# Altium PCB ETAPA DE POTENCIA CERROJO.PcbDoc
Units mm, origin at the board's own origin, x right, y up, seen from the top; angles counter-clockwise.
Board outline 42 x 40 mm, 2 copper layers (Top Layer, Bottom Layer); 8 components, 6 nets, 25 pads, 0 vias.
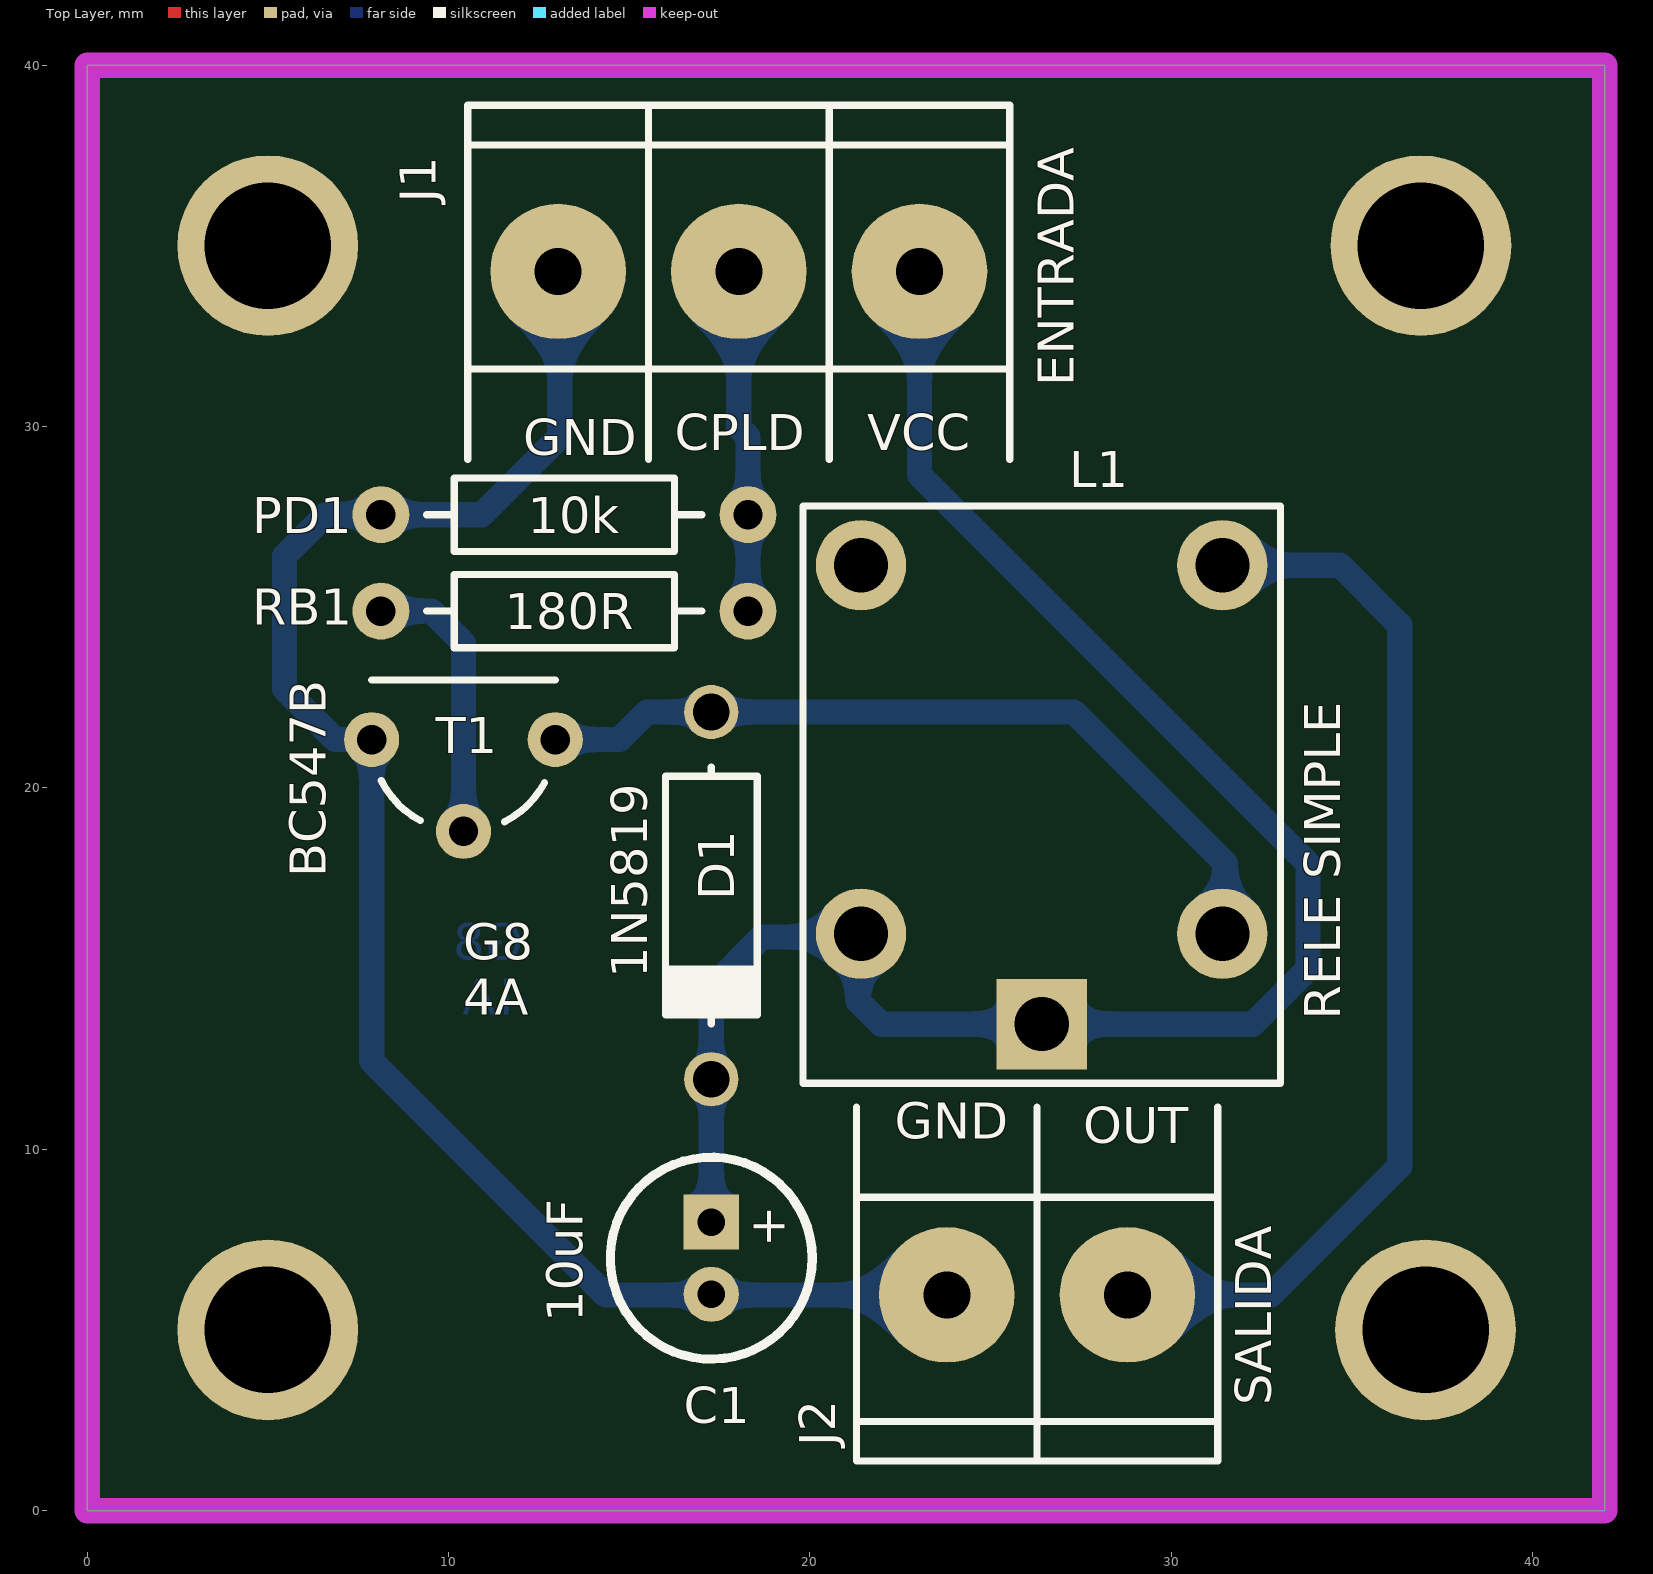
[diagram p0: Top Layer view]
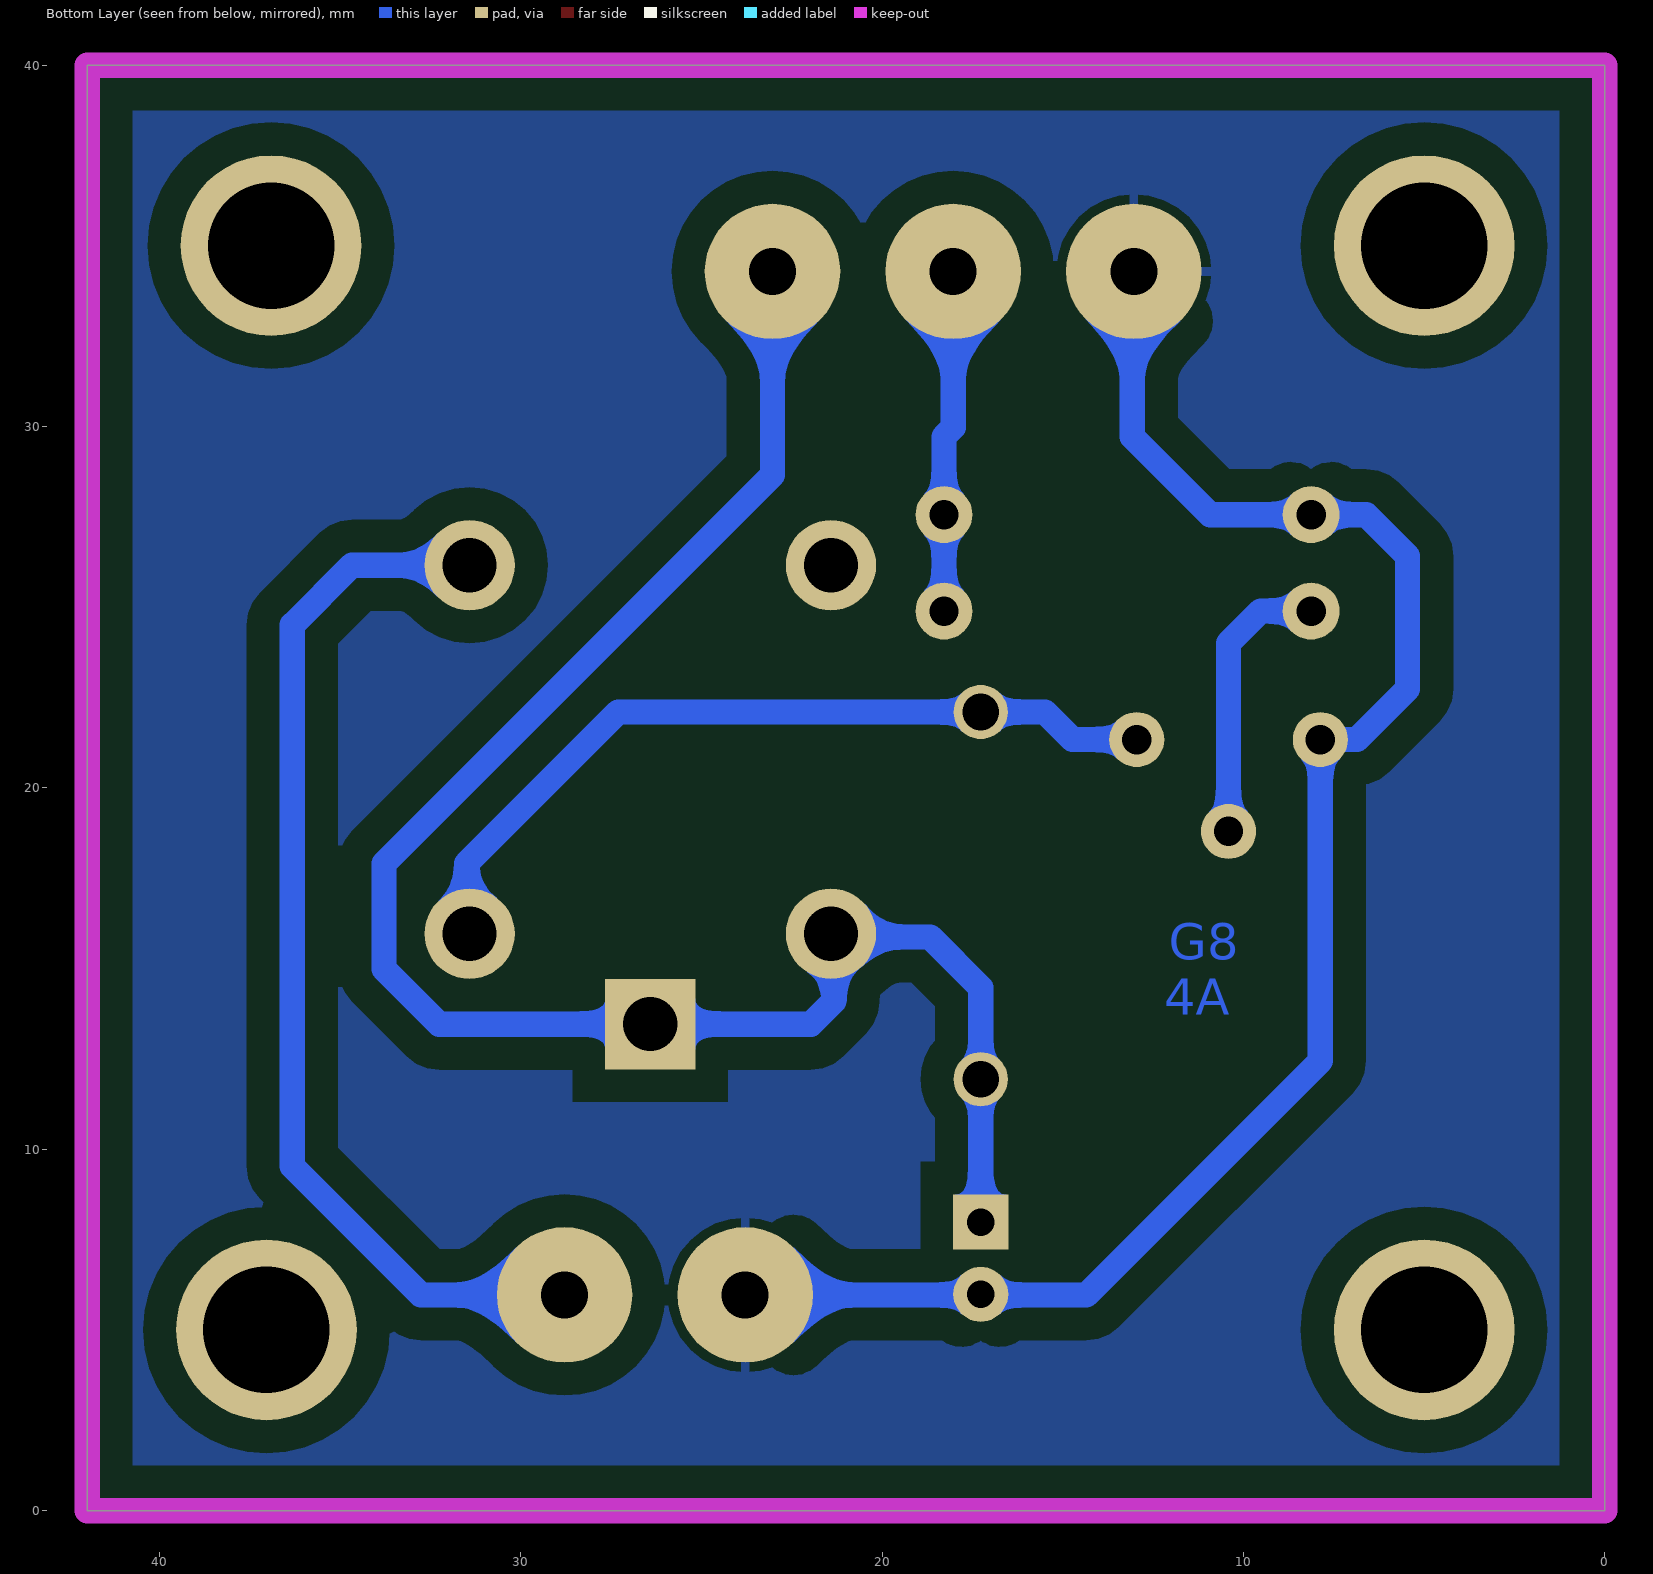
[diagram p1: Bottom Layer view, seen from below]
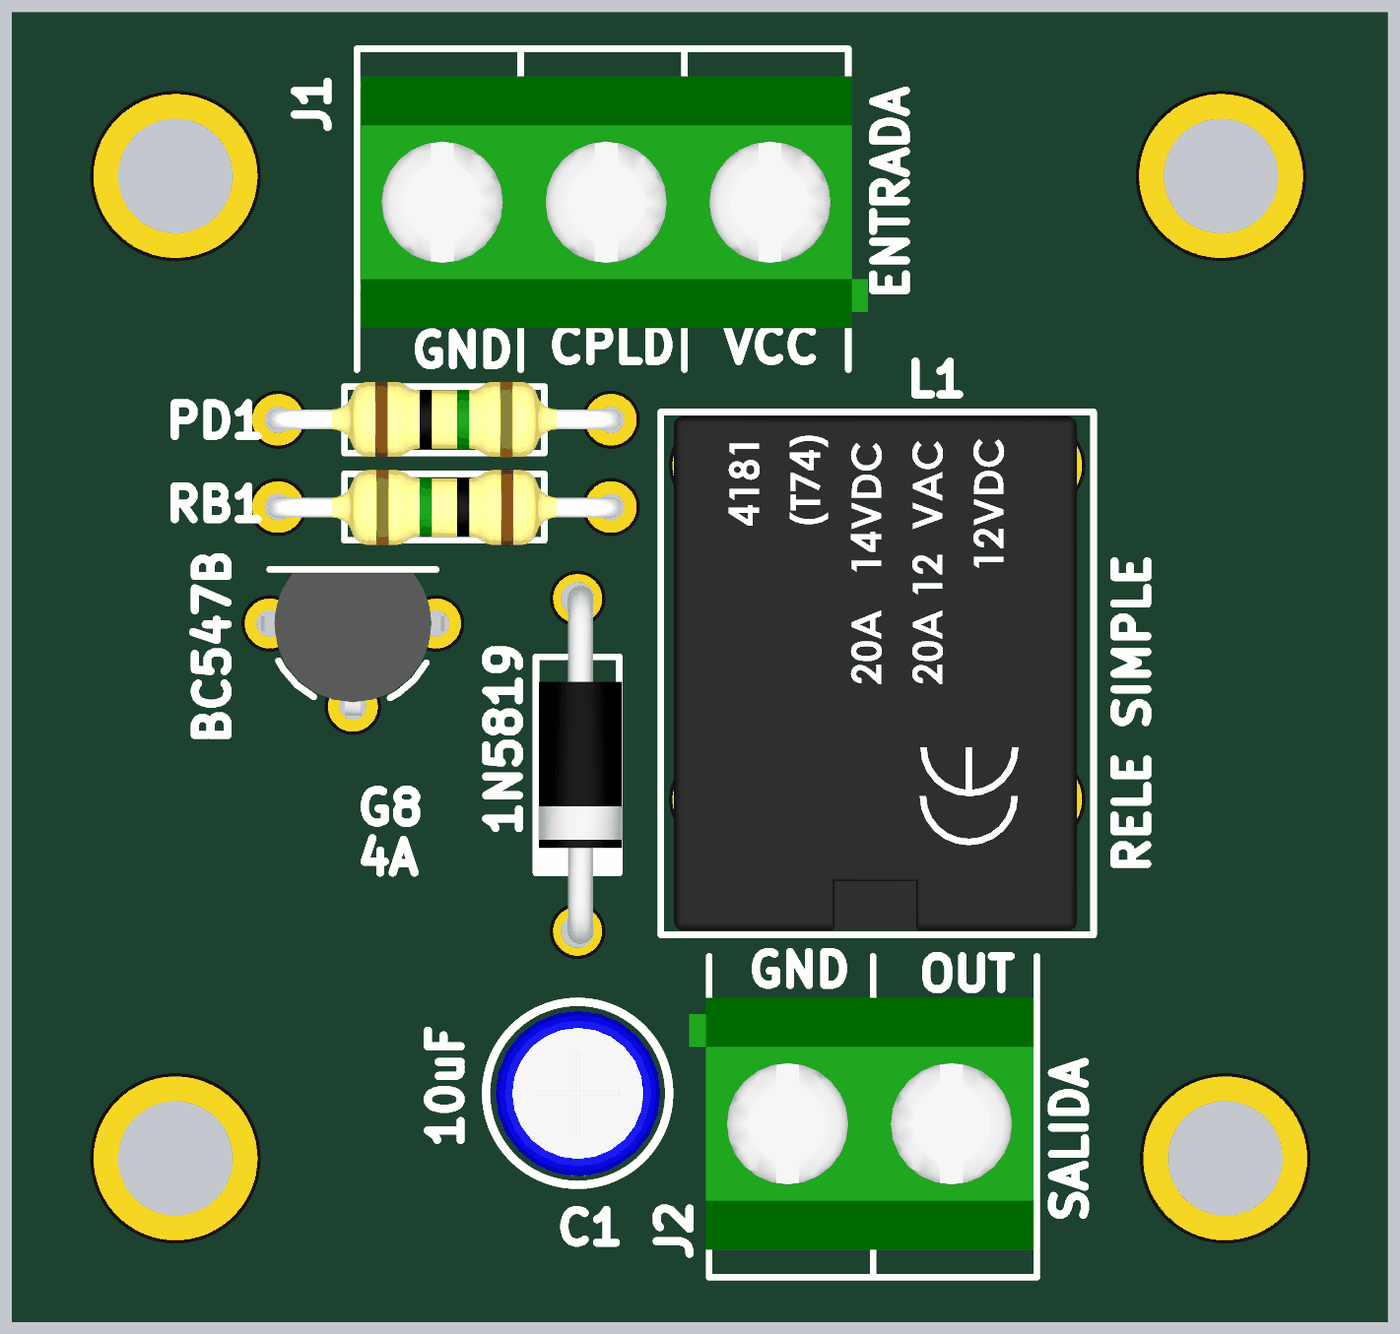
[diagram p2: 3D render of the assembled board from above, using the file's embedded part models]

## Layer stack, top to bottom
Top Solder: solder mask 0.0102, Solder Resist, Dk 3.5
Top Layer: signal copper 0.0356
Dielectric1: dielectric 0.32, FR-4, Dk 4.8
Bottom Layer: signal copper 0.0356
Bottom Solder: solder mask 0.0102, Solder Resist, Dk 3.5

## Board outline
0,0 0,40 42,40 42,0

## Design rules (kind name [scope] priority, off if disabled: settings)
Clearance POLYGON [InPolygon] p1: gap=0.9
Clearance [All] p2: gap=0.3
PolygonConnect [All] p1: connectstyle=Relief reliefconductorwidth=0.254 reliefentries=4 polygonreliefangle="90 Angle" airgapwidth=0.254
RoutingVias [All] p1: holewidth=0.711 width=1.27 viastyle="Through Hole" minholewidth=0.711 minwidth=1.27 maxholewidth=0.711 maxwidth=1.27
SilkToSolderMaskClearance SilkscreenOverComponentPads [IsPad] p1: minsilkscreentomaskgap=0.254 clearancetoexposedcopper=TRUE
SolderMaskExpansion [All] p1: expansion=0.102
Width [All] p1: maxlimit=2 minlimit=0.254 preferedwidth=0.7 toplayer_maxwidth=0.254 toplayer_prefwidth=0.254 bottomlayer_minwidth=0.7 minimp=50.000000 maximp=50.000000 favimp=50.000000
29 further rules are at their usual default settings.

## Components (designator, comment, footprint, x,y, rotation, side; value= is the part's Value field where it differs from the comment)
C1 "10uF" CAP100RP 17.272,6.985 r270 top
D1 "1N5819" DO41 17.272,17.018 r270 top
J1 "ENTRADA" BORNERA3 18.034,34.29 r270 top
J2 "SALIDA" BORNERA2 26.289,5.969 r90 top
L1 "RELE SIMPLE" "RELE SERIE 964" 26.416,19.812 r90 top
PD1 "10k" RES400 8.128,27.559 r0 top
RB1 "180R" RES400 18.288,24.892 r180 top
T1 "BC547B" TO92 10.414,20.066 r0 top

## Footprints (in the part's own frame and the unit in brackets; to place one, negate y for a bottom-side part, rotate by r counter-clockwise, add the part's x,y. Pads: shape width x height; smd on the part's side, far side on the other; paste and mask are expansions set on the pad)
BORNERA2 [mm] "Bornera con Tornillos 5mm separación"
  round 3.75 hole 1.3: 1(0,2.5) 2(0,-2.5)
  silkscreen extent -4.6,-5 5.2,5, body extent -3.76,-4.89 3.94,5.61, height 10
BORNERA3 [mm] "Bornera con Tornillos 5mm separación"
  round 3.75 hole 1.3: 1(0,5) 2(0,0) 3(0,-5)
  silkscreen extent -4.6,-7.5 5.2,7.5, body extent -3.76,-7.39 3.94,8.11, height 10.05
CAP100RP [mil] "Body diameter 5mm"
  rect 60x60 hole 30: 1(-39.37,0)
  round 60 hole 30: 2(39.37,0)
  silkscreen extent -110,-110 110,110, body extent -99,-99 99,100, height 454
DO41 [mm]
  round 1.5 hole 1.016: 1(-5.08,0) 2(5.08,0)
  silkscreen extent -3.56,-1.27 3.56,1.27, body extent -5.46,-1.19 5.46,1.37, height 2.03
"RELE SERIE 964" [mm]
  round 2.5 hole 1.5: B1(-3.85,-5) B2(-3.85,5) NA1(6.35,-5) NC1(6.35,5)
  rect 2.5x2.5 hole 1.5: C1(-6.35,0)
  silkscreen extent -7.99,-6.6 7.99,6.6, body extent -7.85,-6.1 7.85,6.2, height 13.66
RES400 [mil]
  round 62 hole 32: 1(0,0) 2(400,0)
  silkscreen extent 50,-40 350,40, body extent -12,-45 412,46, height 96
TO92 [mil]
  round 60 hole 32: 1(0,-50) 2(100,50) 3(-100,50)
  silkscreen extent -100,-39 100,115, body extent -110,-61 110,110, height 315

## Part data
C1: library part CAPPOL
D1: library part DIODO
J1: library part "BORNERA 3"
J2: library part "BORNERA 2"
PD1 RB1: library part RES
T1: library part "TRANSISTOR NPN"

## Free pads (board coordinates)
  round 5 hole 3.5: 0(5,5) 0(5,35.005) 0(36.91,35.005) 0(37.037,5)

## Nets (pads, with @x,y where several pads share a name; then routed paths per layer and width w, separated by ;. In a path a pad name is that pad's centre, name@x,y a point inside that pad or via, vN(x,y) a via of type N, cw(c..) or ccw(c..) an arc to the next point about the centre after c; other vN are vias at no path point)
CERROJO: J1.2 PD1.2 RB1.1 | length 8.5
  Bottom Layer w0.7: J1.2@18.034,33.576 18.034,29.972 18.288,29.718 PD1.2@18.288,27.813 ; RB1.1 PD1.2
GND: C1.2 J1.3 J2.1 PD1.1 T1.3 | length 47.5
  Bottom Layer w0.7: J1.3@13.081,34.163 13.081,29.718 10.922,27.559 6.604,27.559 5.461,26.416 5.461,22.733 6.858,21.336 T1.3 7.874,12.446 14.351,5.969 C1.2@17.399,5.969 ; C1.2@17.526,5.969 J2.1
NetD1_1: D1.1 L1.B1 T1.2 | length 22.6
  Bottom Layer w0.7: T1.2 14.732,21.336 15.494,22.098 D1.1 27.305,22.098 31.496,17.907 L1.B1@31.496,15.875
NetRB1_2: RB1.2 T1.1 | length 7.9
  Bottom Layer w0.7: RB1.2 9.525,24.892 10.414,24.003 T1.1
SALIDA: J2.2 L1.NA1 | length 29.7
  Bottom Layer w0.7: J2.2@28.702,5.969 J2.2 32.766,5.969 36.322,9.525 36.322,24.511 34.671,26.162 L1.NA1
VCC: C1.1 D1.2 J1.1 L1.B2 L1.C1 | length 49.9
  Bottom Layer w0.7: D1.2@17.145,11.938 17.272,11.811 C1.1 ; D1.2 17.272,14.478 18.669,15.875 21.336,15.875 21.336,14.097 21.971,13.462 L1.C1@26.289,13.462 ; J1.1 23.034,28.655 33.782,17.907 33.782,14.986 32.258,13.462 L1.C1
pads on no net: L1.NC1

## Polygon pours and split planes (outlines as drawn)
GND on Bottom Layer "polygon1" (solid, remove dead copper, pour order 3): 34.417,-1.524 40.005,-1.524 49.022,-1.524 49.022,26.035 45.466,43.561 -0.508,41.021 -1.651,42.164 -1.651,-1.524

## Keep-outs
Keep-Out Layer:
  the board outline again, w0.7

## Other copper
Bottom Layer:
  text "G8" at 12.065,15.24 h1
  text "4A" at 12.192,13.716 h1

## Silkscreen, mask and mechanical layers (free items; w line width, h text height)
Top Overlay:
  text "CPLD" at 16.256,29.337 h1
  text "VCC" at 21.59,29.337 h1
  text "GND" at 12.065,29.21 h1
  text "G8" at 10.414,15.24 h1
  text "4A" at 10.414,13.716 h1
  text "GND" at 22.352,10.287 h1
  text "OUT" at 27.559,10.16 h1

## Text inside footprints (layer, text, board x,y; h text height)
C1: Top Overlay "+" at 18.44,8.433 h1 r270